# EAGLE board DEPDisc experimental v9 (EAGLE 9.7.0)
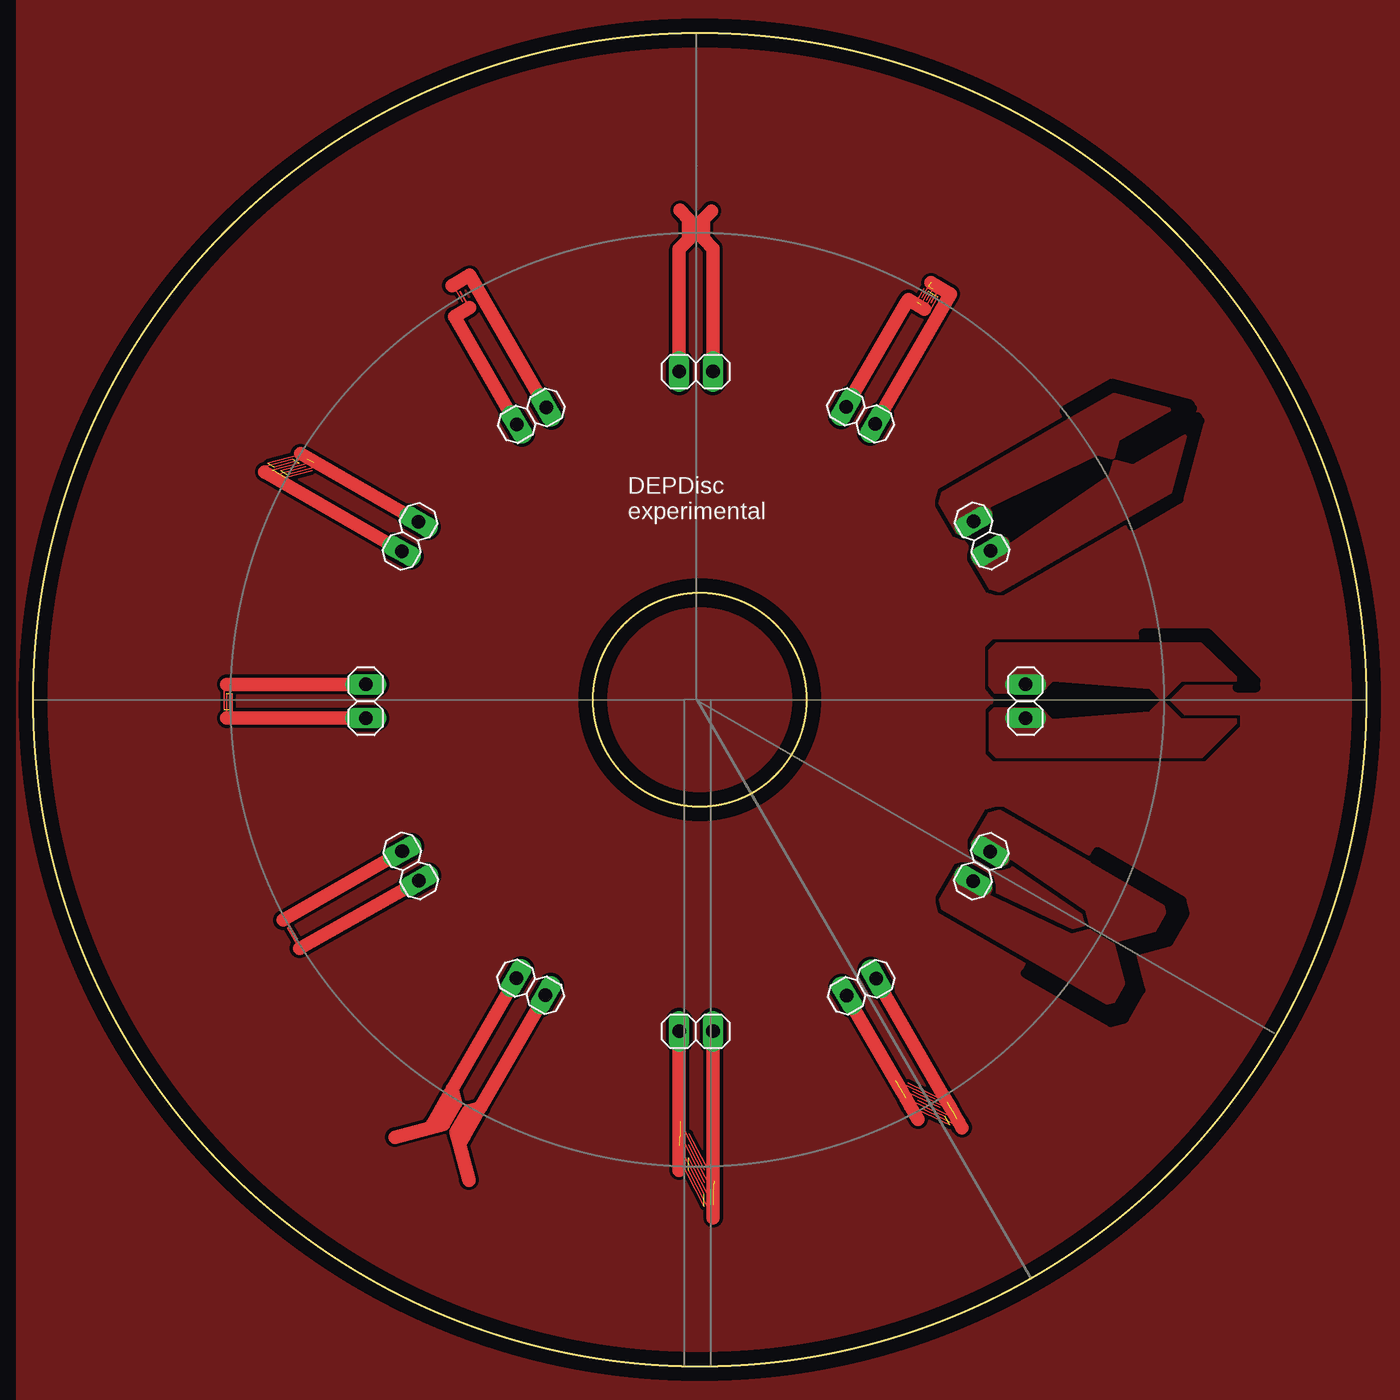
[diagram p0: board, top side]

Size 100 x 100 mm. Coordinates in mm from the lower left corner, seen from the top.
Outline: circle at 50,50 radius 50
Outline: circle at 50,50 radius 8
Copper layers (1*16): Top 0.035mm / dielectric 1.5mm / Bottom 0.035mm
Design rules "Fusion Electronics Design Rules": minimum track width 0.1mm, minimum drill 0.35mm, track to track 0.1mm, track to pad 0.1mm, pad to pad 0.1mm, via to via 0.1mm, smd to smd 6mil, copper to edge 40mil, drill to drill 6mil, minimum pad ring 10mil, minimum via ring 8mil, stop-mask expansion 4mil, vias tented up to drill 0mil, thermal gap 10mil
tRestrict: area 74.4,25.8 to 86.4,38.6; area 70.2,61.6 to 80.8,68.2; area 77.3,63 to 87.5,73.7; area 72.3,49.2 to 84.4,50.7; area 83.3,50.9 to 91.7,55

## Footprints (pad centres in the part's own frame; a part is rotated, then mirrored left to right if it is on the bottom)
1X02 = drill 1.016 long: 1 -1.27,0; 2 1.27,0

## Placement (x,y rotation side)
U$1  PINHD-1X02_1X02M  [1X02]  28.31,37.52 300 top
U$2  PINHD-1X02_1X02M  [1X02]  71.17,62.27 300 top
U$3  PINHD-1X02_1X02M  [1X02]  24.94,49.89 270 top
U$4  PINHD-1X02_1X02M  [1X02]  74.44,49.89 270 top
U$5  PINHD-1X02_1X02M  [1X02]  28.27,62.25 240 top
U$6  PINHD-1X02_1X02M  [1X02]  71.14,37.5 240 top
U$7  PINHD-1X02_1X02M  [1X02]  37.37,71.29 210 top
U$8  PINHD-1X02_1X02M  [1X02]  62.12,28.42 210 top
U$9  PINHD-1X02_1X02M  [1X02]  49.72,74.62 180 top
U$10  PINHD-1X02_1X02M  [1X02]  49.72,25.12 180 top
U$11  PINHD-1X02_1X02M  [1X02]  62.08,71.34 150 top
U$12  PINHD-1X02_1X02M  [1X02]  37.33,28.47 150 top

## Library data of the parts
U$1-U$12 = Tinkercad

## Nets
N$1: U$1.1
N$2: U$1.2
N$3: U$2.1
N$4: U$2.2
N$5: U$3.1
N$6: U$3.2
N$7: U$4.1
N$8: U$4.2
N$9: U$5.1
N$10: U$5.2
N$11: U$6.1
N$12: U$6.2
N$13: U$7.1
N$14: U$7.2
N$15: U$8.1
N$17: U$9.1
N$18: U$9.2
N$19: U$10.1
N$20: U$10.2
N$21: U$11.1
N$22: U$11.2
N$23: U$12.1
N$24: U$12.2
N$40: U$8.2

## Tracks (layer width: path | path; a pad name or v marks a point on that pad's centre or on a via)
N$1
  Top 0.1: 18.73,33.47 19.06,33.34 19.81,32.04
  Top 1: U$1.1 18.73,33.47
N$2
  Top 0.1: 19.97,31.36 19.08,32.89
  Top 1: U$1.2 19.97,31.36
N$3
  pour Top (no thermals): 69.26,62.51 69.95,62.25 71.78,63.3 71.97,64.01 71.77,64.37 71.77,64.37 71.75,64.4 71.76,64.44 71.8,64.47 71.8,64.47 71.82,64.48 71.84,64.49 71.84,64.49 79.82,68.34 79.84,68.35 79.84,68.35 79.84,68.35 79.86,68.34 80.92,68.06 81.1,68.16 81.44,69.44 81.44,69.46 81.45,69.46 81.45,69.47 81.45,69.5 81.45,69.5 81.45,69.5 81.47,69.51 81.49,69.52 81.49,69.52 81.49,69.52 81.51,69.51 81.53,69.51 85.36,71.72 85.27,71.88 81.08,73 68.17,65.55 67.96,64.77
N$4
  pour Top (no thermals): 71.75,58.29 72.47,58.1 85.38,65.55 86.5,69.75 86.41,69.9 82.53,67.66 82.5,67.64 82.46,67.65 82.46,67.65 81.2,67.99 81.02,67.89 80.74,66.85 80.74,66.83 80.74,66.83 80.73,66.83 80.72,66.82 73.37,61.74 73.37,61.74 73.35,61.73 73.34,61.72 73.33,61.72 73.33,61.72 73.31,61.72 73.29,61.72 73.29,61.73 73.29,61.73 73.28,61.74 73.27,61.76 73.27,61.76 73.07,62.12 72.35,62.31 70.49,61.23 70.35,60.72
N$5  (1 unrouted)
  Top 0.1: 14.52,51.16 14.32,50.96 14.32,49.29 | 14.72,50.96 14.72,49.29
  Top 1: U$3.1 15.19,51.16 14.52,51.16
N$6  (1 unrouted)
  Top 0.1: 14.52,48.62 14.52,50.49 | 14.92,48.62 14.92,50.49
  Top 1: U$3.2 14.52,48.62
N$7
  pour Top (no thermals): 84.57,50.07 84.78,50.07 86.13,51.42 90.25,51.42 90.25,51.7 87.58,54.27 72.27,54.27 71.7,53.7 71.7,51.08 72.16,50.52 75.58,50.52 76.43,51.37 76.43,51.37 76.45,51.39 76.46,51.4 76.46,51.4 76.46,51.4 76.48,51.4 76.5,51.4 76.5,51.4 83.76,50.86 83.78,50.86 83.78,50.85 83.78,50.85 83.8,50.84
N$8
  pour Top (no thermals): 90.25,48.24 90.25,48.57 86.08,48.57 84.78,49.87 84.57,49.87 83.81,49.11 83.8,49.1 83.8,49.1 83.8,49.09 83.78,49.09 76.49,48.5 76.49,48.5 76.47,48.5 76.45,48.5 76.45,48.5 76.45,48.5 76.43,48.51 76.42,48.52 76.42,48.53 75.58,49.37 72.12,49.37 71.75,49 71.75,46.19 72.27,45.67 87.68,45.67
N$9  (3 unrouted)
  Top 0.1: 17.57,67.75 20.02,68.41 20.05,68.46 | 21.57,67.58 19.06,66.91 | 21.02,67.84 20.54,67.71 20.52,67.72 18.56,67.19 | 20.51,68.11 20.07,67.99 20.04,68 18.07,67.47
  Top 1: U$5.1 20.05,68.46
N$10  (4 unrouted)
  Top 0.1: 17.36,67.09 17.31,67.27 17.45,67.52 19.45,68.05 | 17.71,66.66 18.03,67.22 | 18.89,66.66 20.9,67.2 | 18.41,66.94 20.43,67.48 | 17.92,67.23 19.95,67.77
  Top 1: U$5.2 17.36,67.09
N$11
  pour Top (no thermals): 79.3,32.93 81.21,31.83 84.18,32.62 84.98,34.02 84.83,34.59 72.48,41.72 71.7,41.51 70.4,39.25 70.51,38.53 72.35,37.47 73.06,37.66 73.28,38.05 73.31,38.06 73.32,38.06 73.32,38.06 73.36,38.04 73.36,38.04 73.37,38.03 73.37,38.03 73.38,38.02 73.4,38.01 73.4,38.01 78.94,34.24 78.95,34.23 78.95,34.23 78.96,34.23 78.96,34.21
N$12
  pour Top (no thermals): 68.18,34.27 80.53,27.14 81.1,27.3 81.91,28.69 81.11,31.66 79.2,32.76 77.93,32.42 77.91,32.41 77.91,32.41 77.9,32.41 77.89,32.42 71.78,35.31 71.78,35.31 71.77,35.32 71.75,35.33 71.75,35.33 71.75,35.33 71.74,35.35 71.74,35.37 71.74,35.37 71.74,35.37 71.75,35.39 71.75,35.41 71.76,35.41 71.96,35.76 71.77,36.47 69.9,37.55 69.39,37.42 67.99,34.98
N$13
  Top 0.1: 31.5,81.12 32.22,79.86
  Top 1: U$7.1 32.75,81.84 31.5,81.12 31.41,81.07
N$14
  Top 0.1: 32.72,79.4 32.02,80.61
  Top 1: U$7.2 31.6,78.75 32.72,79.4
N$15  (3 unrouted)
  Top 0.1: 66.73,19.31 69.67,17.89 | 69.3,18.54 66.36,19.96 | 68.92,19.19 65.98,20.61 | 68.55,19.84 65.61,21.25
  Top 1: U$8.1 68.22,20.4 68.84,19.34 | 68.99,19.07 68.84,19.34 | 69.67,17.89 69.45,18.28 68.84,19.34
N$17
  Top 1: U$9.1 50.99,83.86 50.27,84.58 50.27,85.67 50.27,86.07 50.87,86.67
N$18
  Top 1: 48.45,75.58 U$9.2 48.45,83.8 49.17,84.52 49.17,85.67 49.17,86.07 48.52,86.72
N$19  (3 unrouted)
  Top 0.1: 51,11.15 49.15,14.7 | 51,12.1 49.15,15.65 | 51,13.05 49.15,16.6 | 51.05,13.9 49.2,17.45
  Top 1: U$10.1 51,11.15
N$20  (3 unrouted)
  Top 0.1: 48.45,15.61 50.3,12 | 48.45,16.56 50.3,12.95 | 48.5,17.41 50.35,13.8 | 48.5,18.36 50.35,14.75
  Top 1: U$10.2 48.45,15.61 48.45,15.47 48.45,15.21 48.45,15.06 48.45,14.72 48.45,14.7
N$21  (2 unrouted)
  Top 0.1: 67.79,81.03 67.88,80.69 67.35,79.78 | 67.51,80.85 67.01,79.98 | 67.16,81.05 66.66,80.18
  Top 1: U$11.1 68.8,80.45 67.79,81.03 67.35,81.28
N$22  (3 unrouted)
  Top 0.1: 67.25,79.21 67.85,80.25 | 66.86,79.32 67.51,80.45 | 66.58,79.65 67.16,80.65 | 66.24,79.85 66.81,80.85
  Top 1: U$11.2 65.42,79.67 65.44,79.67 65.64,80.02 66.86,79.32
N$23
  Top 1: 33.61,19.5 U$12.1 | 33.61,19.5 33.56,19.41 32.65,19.17 31.72,17.56 | 31.72,17.56 31.85,17.09 32.13,16.93 32.32,17.26 33.61,19.5 | 31.72,17.56 32.69,13.95
N$24
  Top 1: U$12.2 31.41,20.77 31.69,19.72 30.79,18.16 | 30.79,18.16 30.25,18.01 29.94,18.19 31.47,20.83 | 30.79,18.16 27.13,17.17
N$40  (3 unrouted)
  Top 0.1: 65.81,19.49 68.75,18.11 | 65.44,20.14 68.38,18.76 | 65.06,20.79 68,19.41 | 64.69,21.44 67.63,20.05
  Top 1: U$8.2 65.17,20.6 65.47,20.08 65.81,19.49 65.82,19.48 66.12,18.95 66.37,18.52
N$100
  pour Top (isolate 0.254, rank 2, no thermals): -1.25,-11.35 103.9,-11.35 103.9,107.6 -1.25,107.6

## Text on the board
tNames: DEPDisc / experimental